# EAGLE board PLT-01-RevA (EAGLE 7.6.0)
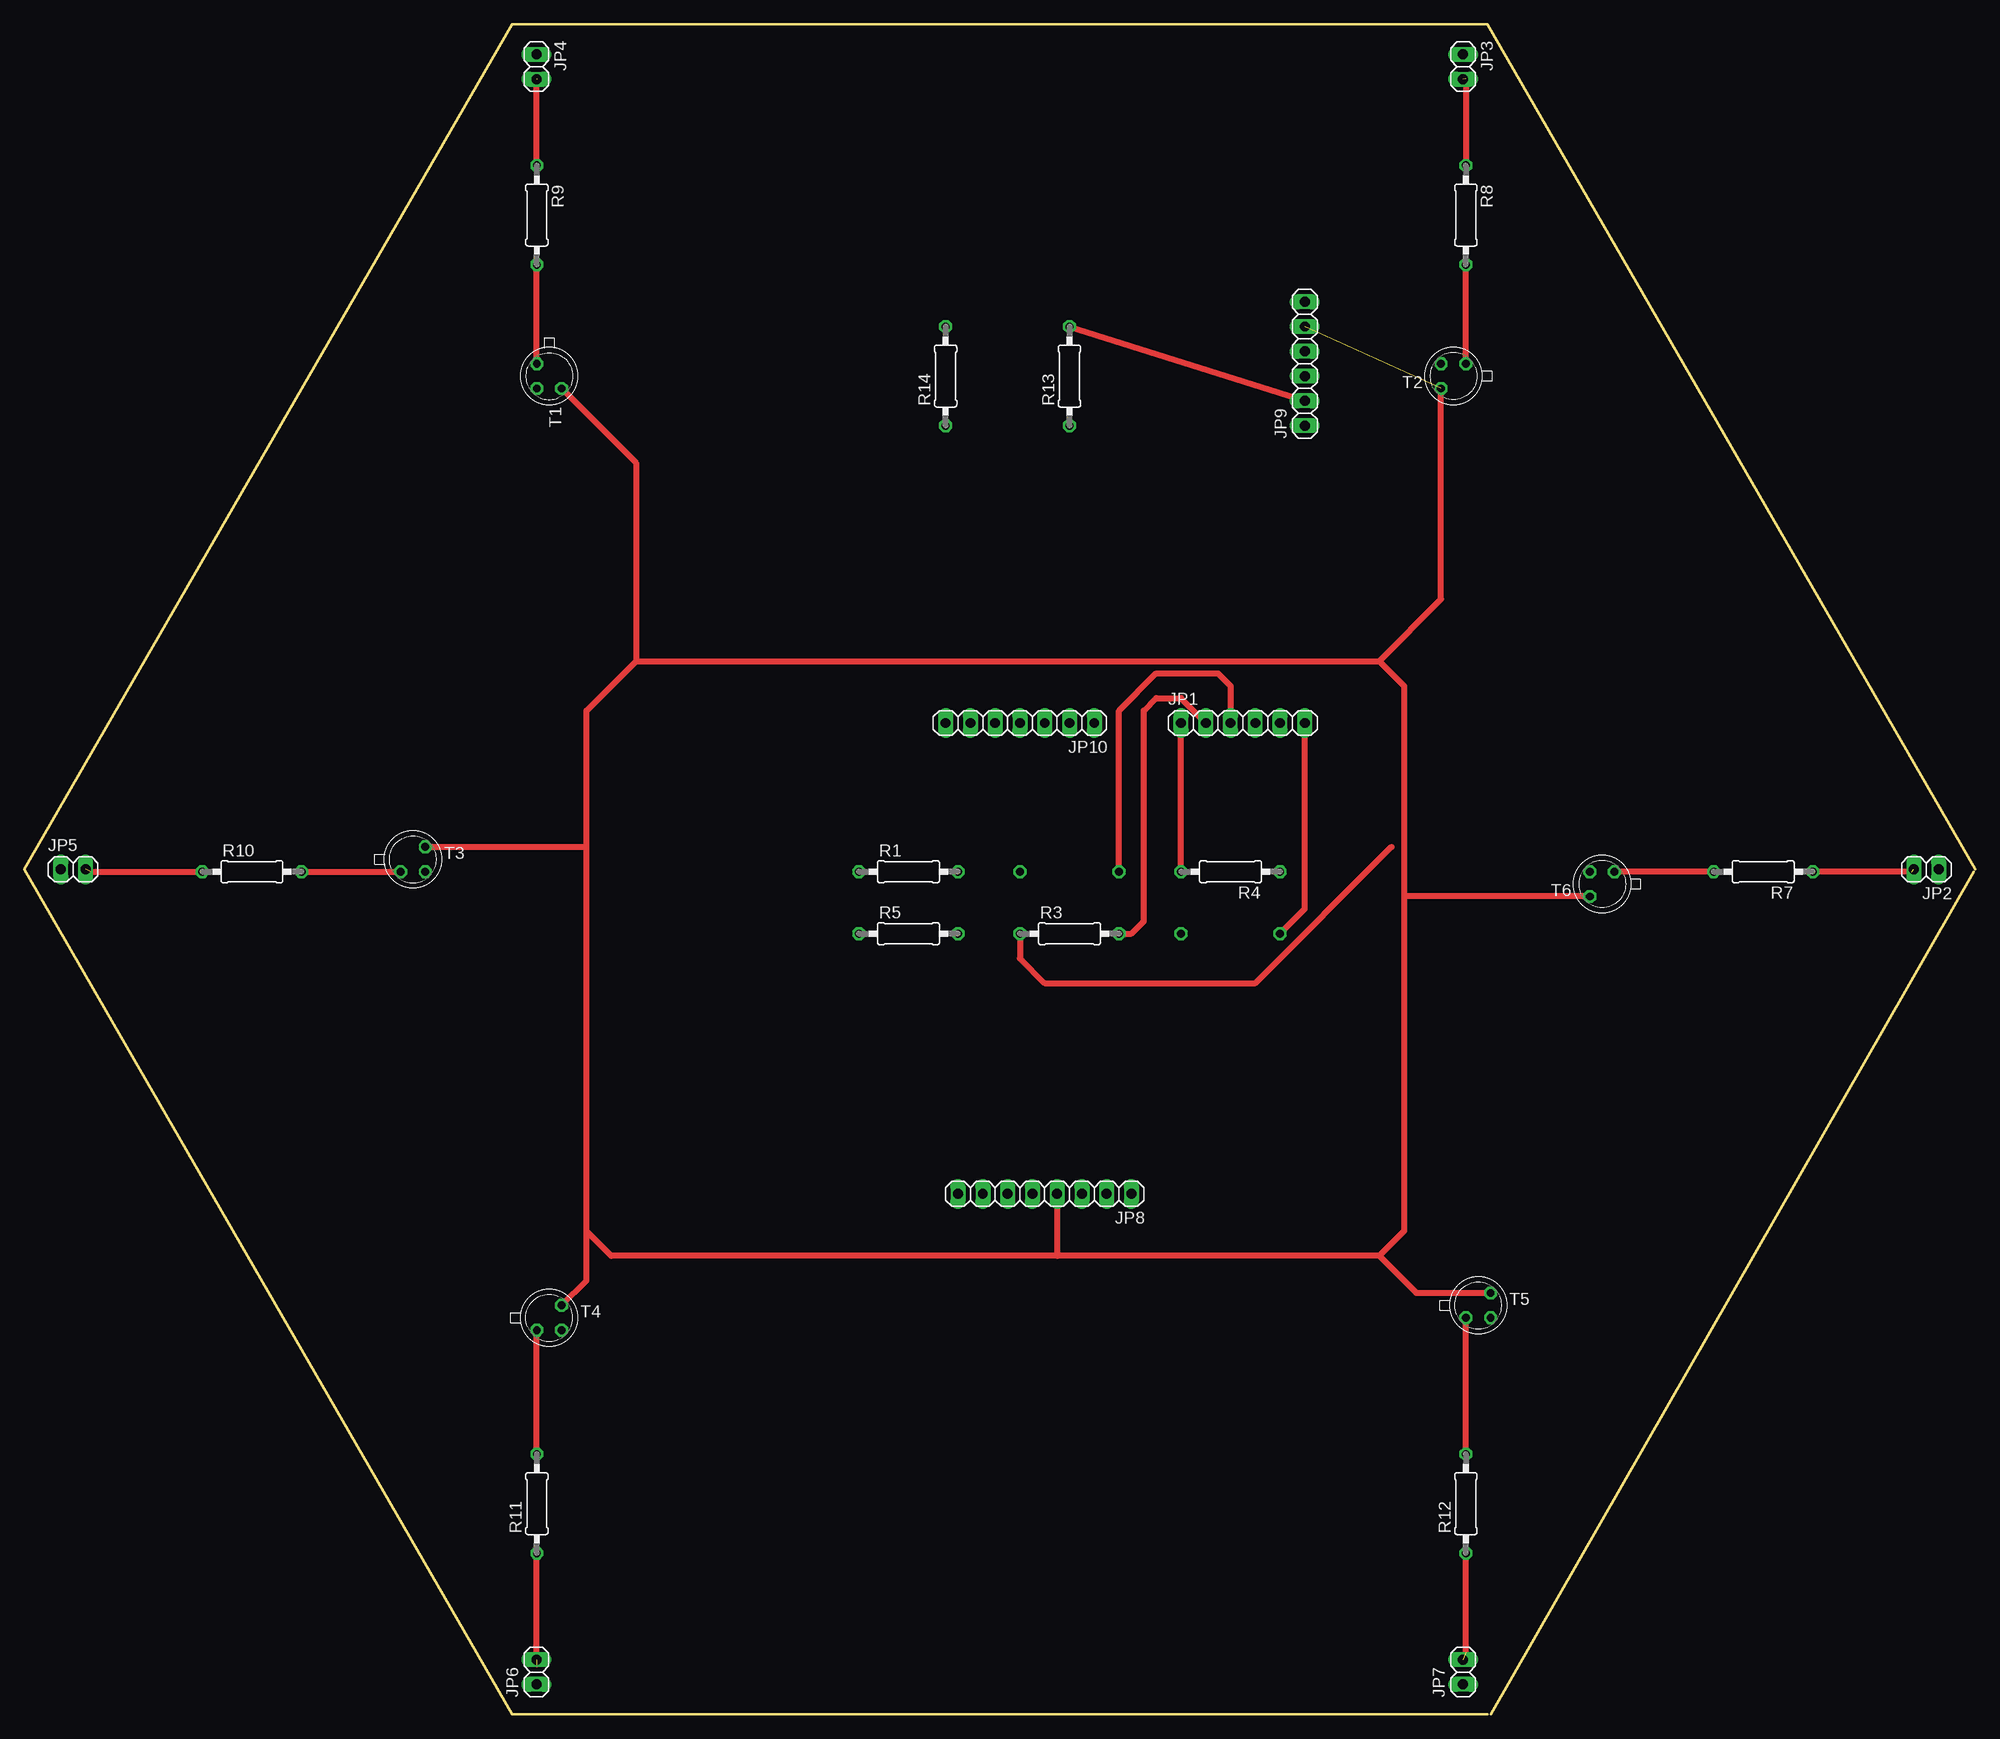
[diagram p0: board, top side]
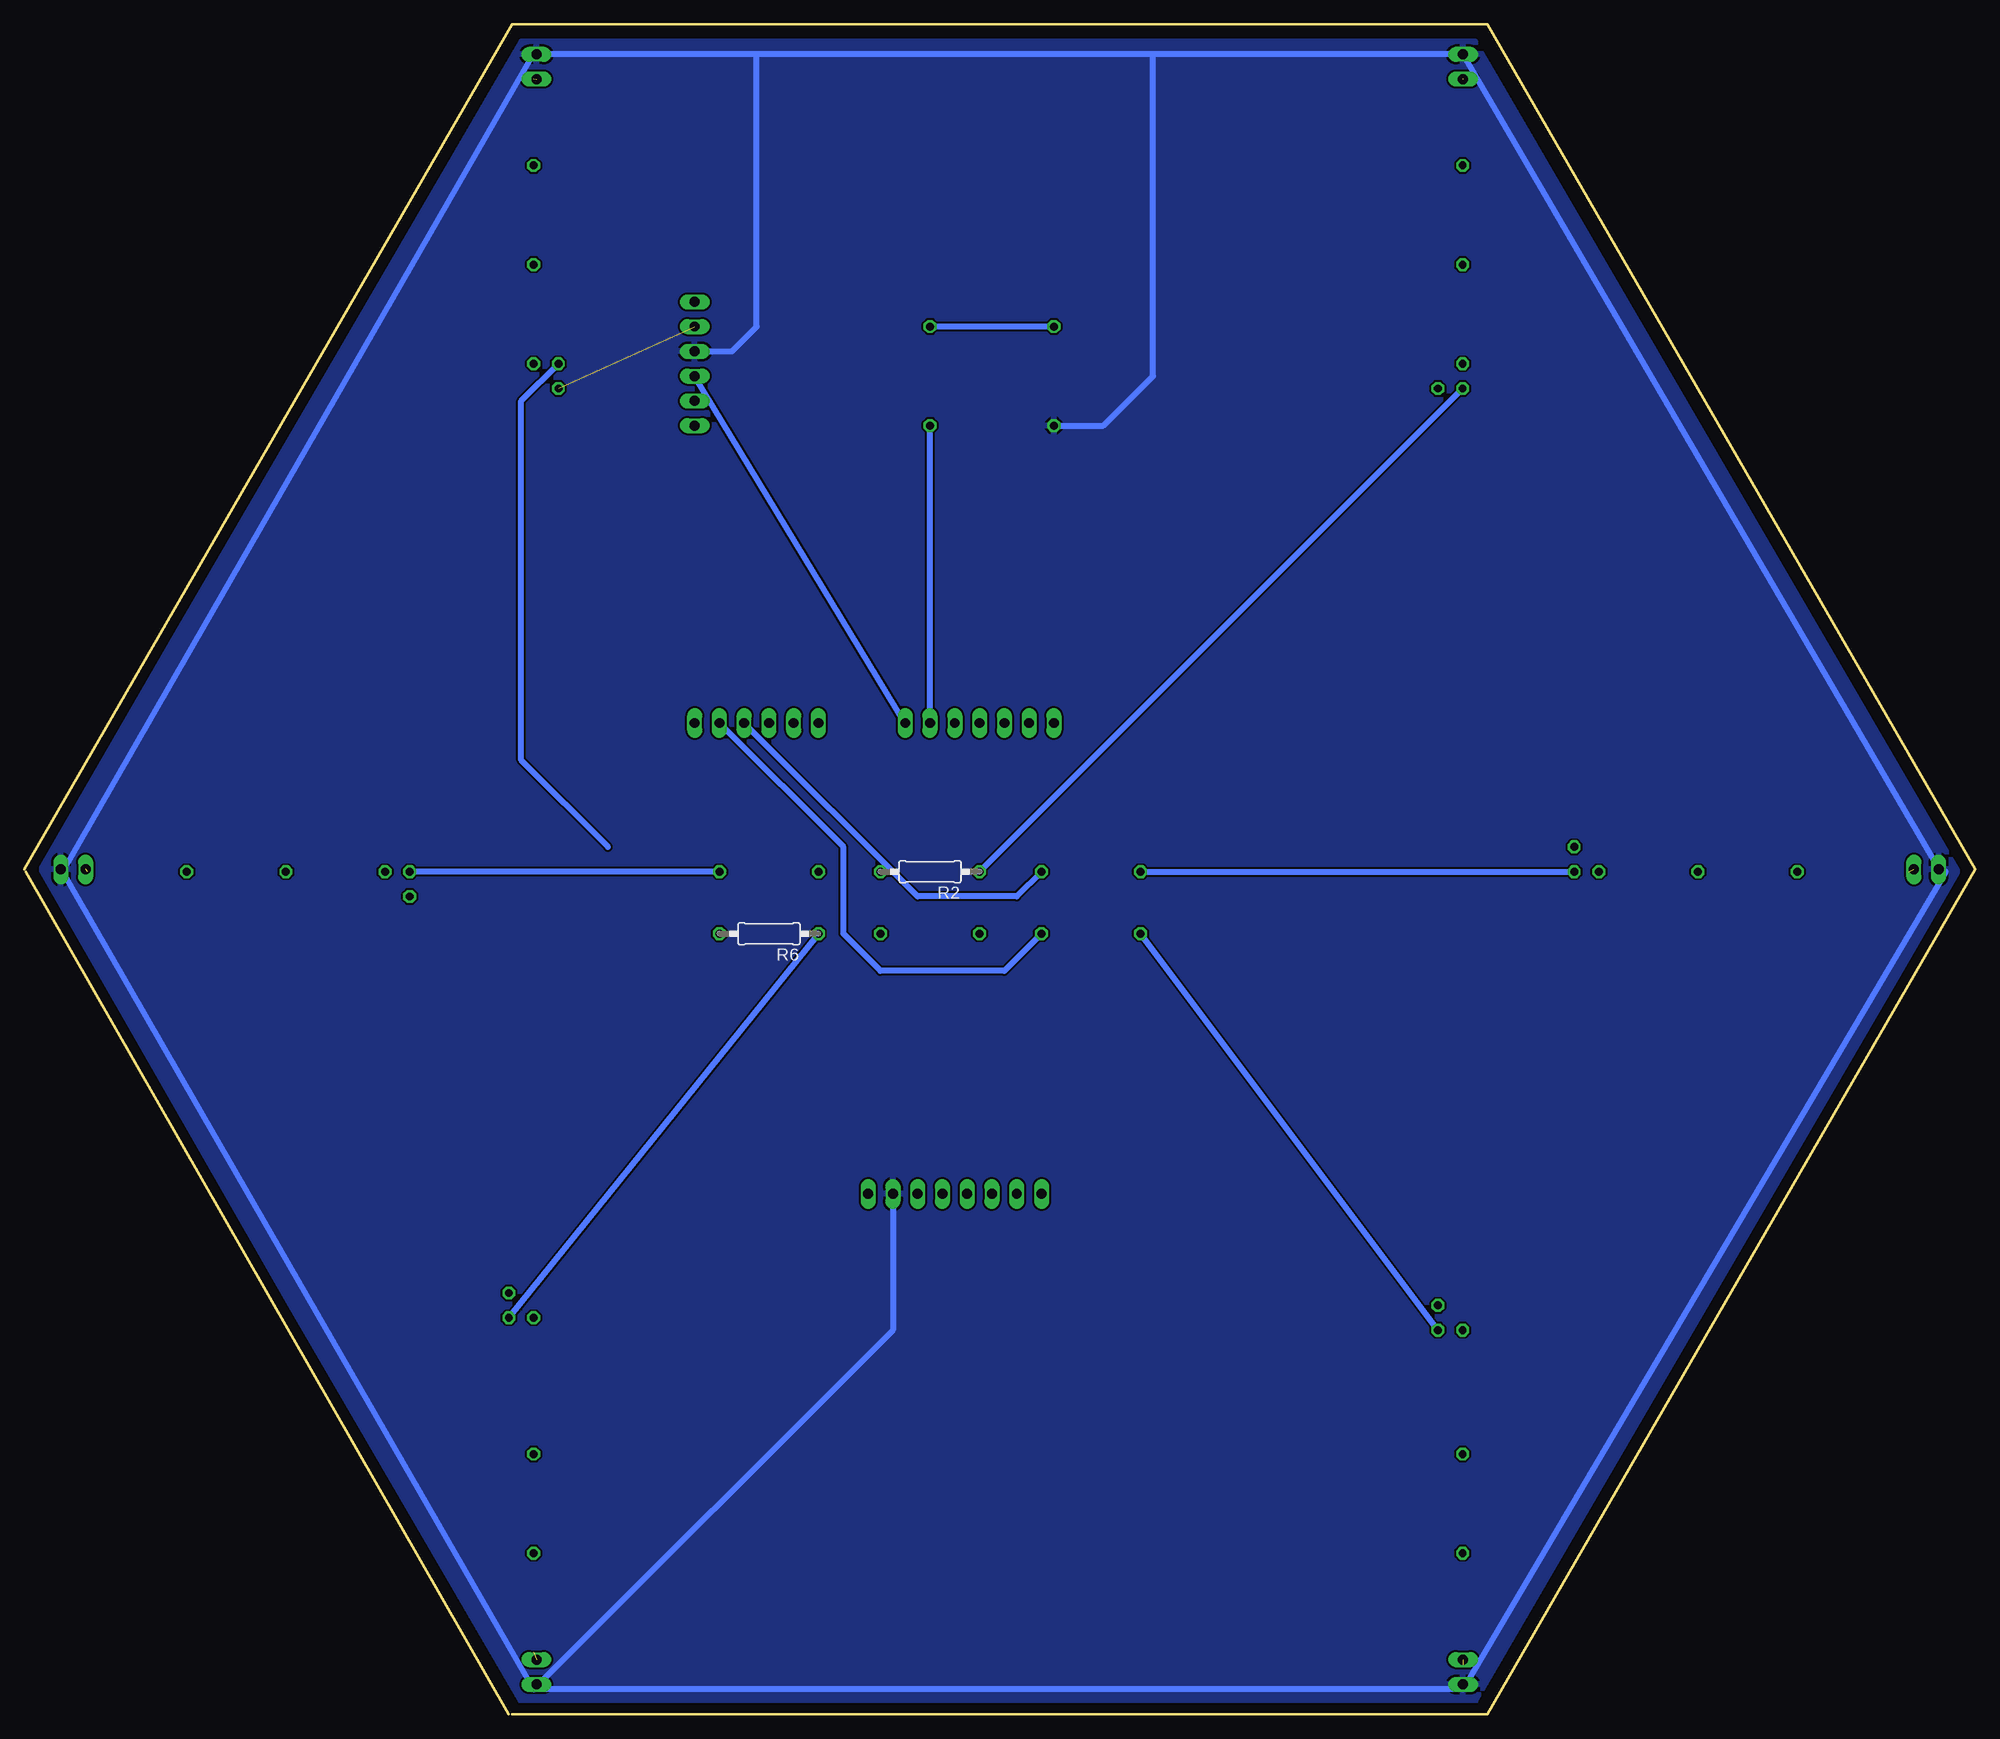
[diagram p1: board, bottom side, seen from below]

Size 200 x 173.21 mm. Coordinates in mm from the lower left corner, seen from the top.
Outline: 150,0 50,0 0,86.6 50,173.21 150,173.21 200,86.6
Outline: 199.86,86.36 150.33,0
Copper layers (1*16): Top 0.035mm / dielectric 1.5mm / Bottom 0.035mm
Design rules "default": minimum track width 10mil, minimum drill 24mil, track to track 8mil, track to pad 8mil, pad to pad 8mil, via to via 8mil, smd to smd 8mil, copper to edge 40mil, drill to drill 8mil, minimum pad ring 10mil, minimum via ring 8mil, stop-mask expansion 4mil, vias tented up to drill 0mil, thermal gap 10mil

## Footprints (pad centres in the part's own frame; a part is rotated, then mirrored left to right if it is on the bottom)
1X06 = drill 1.016 long: 1 -6.35,0; 2 -3.81,0; 3 -1.27,0; 4 1.27,0; 5 3.81,0; 6 6.35,0
1X02 = drill 1.016 long: 1 -1.27,0; 2 1.27,0
1X08 = drill 1.016 long: 1 -8.89,0; 2 -6.35,0; 3 -3.81,0; 4 -1.27,0; 5 1.27,0; 6 3.81,0; 7 6.35,0; 8 8.89,0
1X07 = drill 1.016 long: 1 -7.62,0; 2 -5.08,0; 3 -2.54,0; 4 0,0; 5 2.54,0; 6 5.08,0; 7 7.62,0
0207/10 = drill 0.813 octagon: 1 -5.08,0; 2 5.08,0
TO18 = drill 0.813 octagon: 1 -1.27,-1.27; 2 1.27,-1.27; 3 1.27,1.27

## Placement (x,y rotation side)
JP1  [1X06]  124.93,101.6 0 top
JP2  [1X02]  195,86.6 180 top
JP3  [1X02]  147.5,168.88 270 top
JP4  [1X02]  52.5,168.88 270 top
JP5  [1X02]  5,86.6 0 top
JP6  [1X02]  52.5,4.33 90 top
JP7  [1X02]  147.5,4.33 90 top
JP8  [1X08]  104.61,53.34 180 top
JP9  [1X06]  131.28,138.43 90 top
JP10  [1X07]  102.07,101.6 180 top
R1  [0207/10]  90.64,86.36 0 top
R2  [0207/10]  107.15,86.36 180 bottom
R3  [0207/10]  107.15,80.01 0 top
R4  [0207/10]  123.66,86.36 180 top
R5  [0207/10]  90.64,80.01 0 top
R6  [0207/10]  123.66,80.01 180 bottom
R7  [0207/10]  178.27,86.36 180 top
R8  [0207/10]  147.79,153.67 270 top
R9  [0207/10]  52.54,153.67 270 top
R10  [0207/10]  23.33,86.36 0 top
R11  [0207/10]  52.54,21.59 90 top
R12  [0207/10]  147.79,21.59 90 top
R13  [0207/10]  107.15,137.16 90 top
R14  [0207/10]  94.45,137.16 90 top
T1  2N2222  [TO18]  53.81,137.16 270 top
T2  2N2222  [TO18]  146.52,137.16 180 top
T3  2N2222  [TO18]  39.84,87.63 0 top
T4  2N2222  [TO18]  53.81,40.64 0 top
T5  2N2222  [TO18]  149.06,41.91 0 top
T6  2N2222  [TO18]  161.76,85.09 180 top

## Library data of the parts
JP1-JP10 = pinhead
R1-R14 = resistor
T1-T6 = transistor

## Nets
GND: JP2.1 JP3.1 JP4.1 JP5.1 JP6.1 JP8.2 JP9.4 R14.1
N$1: JP1.1 R4.2
N$2: JP1.2 R3.2
N$3: JP1.3 R2.2
N$4: JP1.4 R1.2
N$5: JP1.5 R5.2
N$6: JP1.6 R6.2
N$7: R6.1 T5.2
N$8: R5.1 T4.2
N$9: R1.1 T3.2
N$10: R2.1 T1.2
N$11: R3.1 T2.2
N$12: R4.1 T6.2
N$13: R7.2 T6.1
N$14: JP2.2 R7.1
N$15: R8.2 T2.1
N$16: JP3.2 R8.1
N$17: R9.2 T1.1
N$18: JP4.2 R9.1
N$19: R10.2 T3.1
N$20: JP5.2 R10.1
N$21: R11.2 T4.1
N$22: JP6.2 R11.1
N$23: R12.2 T5.1
N$24: JP7.2 R12.1
N$25: JP10.2 R13.1
N$26: JP9.2 R13.2 R14.2
N$27: JP9.3 JP10.1
N$28: JP8.4 JP9.5 T1.3 T2.3 T3.3 T4.3 T5.3 T6.3
N$36: JP7.1

## Tracks (layer width: path | path; a pad name or v marks a point on that pad's centre or on a via)
GND
  Bottom 0.61: 3.01,86.36 52.54,2.54 147.79,2.54 | JP8.2 110.96,39.37 147.79,2.54 | 147.79,2.54 196.05,86.36 147.79,170.18 124.93,170.18 | 124.93,170.18 84.29,170.18 | 84.29,170.18 52.54,170.18 3.7,86.6 | R14.1 89.37,132.08 84.29,137.16 84.29,170.18 | JP9.4 127.47,139.7 124.93,142.24 124.93,170.18
  pour Bottom: 1.74,86.36 51.27,171.45 149.06,171.45 198.59,86.36 149.06,1.27 51.27,1.27
N$1
  Top 0.61: R4.2 JP1.1
N$2
  Top 0.61: R3.2 113.5,80.01 114.77,81.28 114.77,102.87 116.04,104.14 118.58,104.14 JP1.2
N$3
  Top 0.61: R2.2 112.23,102.87 116.04,106.68 122.39,106.68 123.66,105.41 JP1.3
N$4
  Bottom 0.61: R1.2 98.26,83.82 108.42,83.82 JP1.4
N$5
  Bottom 0.61: R5.2 99.53,76.2 112.23,76.2 116.04,80.01 116.04,88.9 JP1.5
N$6
  Top 0.61: R6.2 131.28,82.55 JP1.6
N$7
  Bottom 0.61: R6.1 T5.2
N$8
  Bottom 0.61: T4.2 R5.1
N$9
  Bottom 0.61: R1.1 T3.2
N$10
  Bottom 0.61: R2.1 T1.2
N$11  (1 unrouted)
  Top 0.61: R3.1 102.07,77.47 104.61,74.93 126.2,74.93 140.17,88.9
  Bottom 0.61: 140.17,88.9 149.06,97.79 149.06,134.62 T2.2
N$12
  Bottom 0.61: R4.1 T6.2
N$13
  Top 0.61: R7.2 T6.1
N$14  (1 unrouted)
  Top 0.61: 193.51,86.36 R7.1
N$15
  Top 0.61: T2.1 R8.2
N$16  (1 unrouted)
  Top 0.61: 147.79,167.64 R8.1
N$17
  Top 0.61: T1.1 R9.2
N$18  (1 unrouted)
  Top 0.61: R9.1 52.54,167.64
N$19
  Top 0.61: R10.2 T3.1
N$20  (1 unrouted)
  Top 0.61: 6.82,86.36 R10.1
N$21
  Top 0.61: R11.2 T4.1
N$22  (1 unrouted)
  Top 0.61: 52.54,5.08 R11.1
N$23
  Top 0.61: R12.2 T5.1
N$24  (1 unrouted)
  Top 0.61: 147.79,6.35 R12.1
N$25
  Bottom 0.61: JP10.2 R13.1
N$26
  Top 0.61: R13.2 JP9.2
  Bottom 0.61: R14.2 R13.2
N$27
  Bottom 0.61: JP10.1 JP9.3
N$28  (1 unrouted)
  Top 0.61: 62.7,107.95 57.62,102.87 57.62,88.9 | 62.7,107.95 138.9,107.95 | 138.9,107.95 141.44,105.41 141.44,83.82 | 141.44,83.82 141.44,49.53 138.9,46.99 | 138.9,46.99 105.88,46.99 | 105.88,46.99 60.16,46.99 57.62,49.53 | 57.62,49.53 57.62,88.9 | JP8.4 105.88,46.99 | T1.3 62.7,128.27 62.7,107.95 | T3.3 57.62,88.9 | T4.3 57.62,44.45 57.62,49.53 | 138.9,46.99 142.71,43.18 T5.3 | T6.3 141.44,83.82 | 138.9,107.95 145.25,114.3 T2.3